# Altium PCB first crack.PcbDoc
Units mil, origin at the board's own origin, x right, y up, seen from the top; angles counter-clockwise.
Board outline 1150 x 1150 mil, 2 copper layers (Top Layer, Bottom Layer), stack 12.8 mil thick; 18 components, 33 nets, 116 pads, 36 vias.
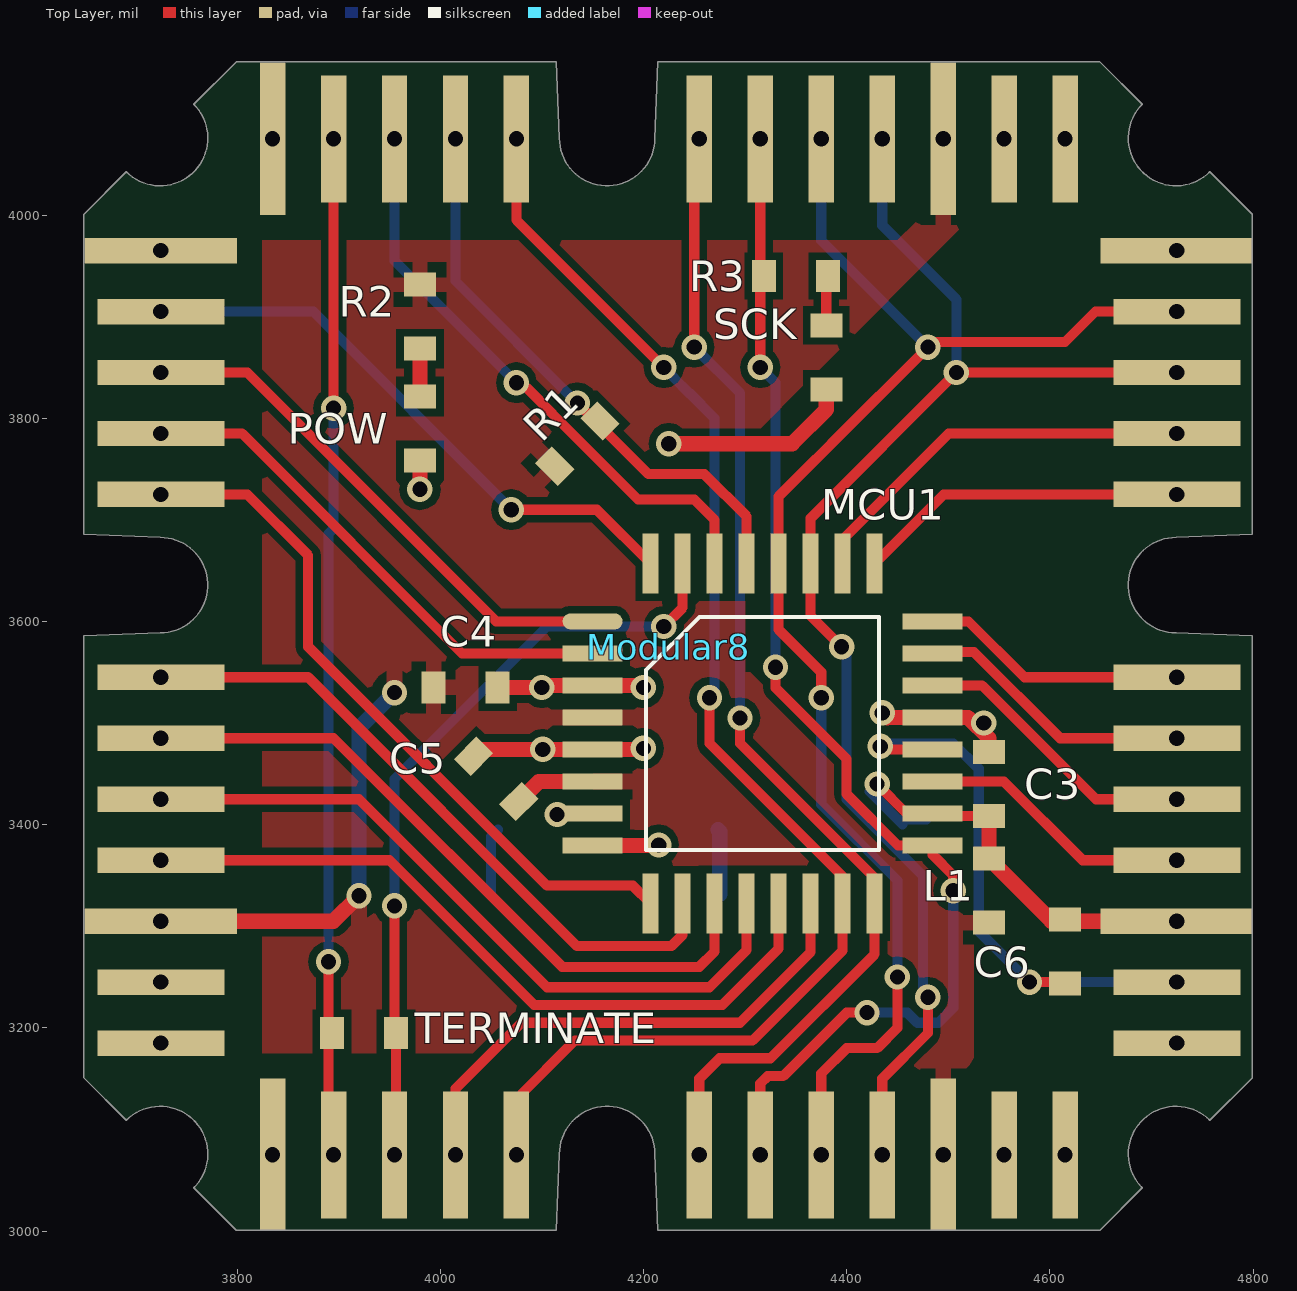
[diagram p0: Top Layer view]
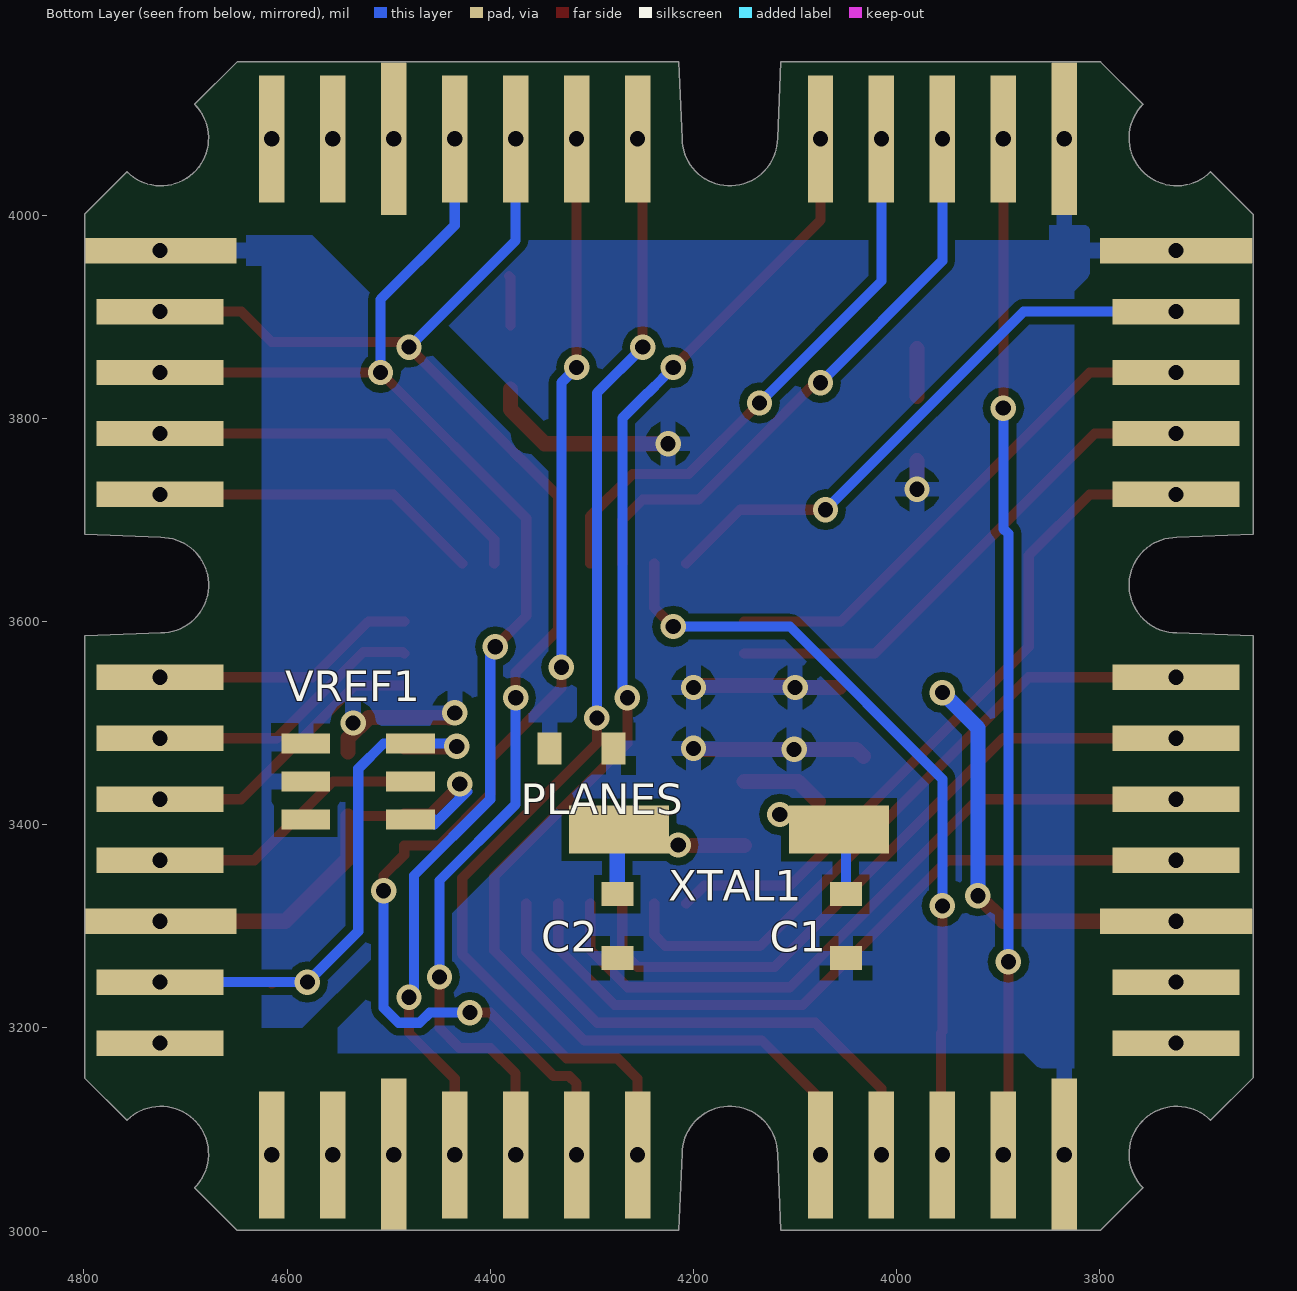
[diagram p1: Bottom Layer view, seen from below]

## Layer stack, top to bottom
Top Solder: solder mask 0.4, Solder Resist, Dk 3.5
Top Layer: signal copper 1.4
Dielectric 1: core 10, FR-4, Dk 4.2
Bottom Layer: signal copper 1.4
Bottom Solder: solder mask 0.4, Solder Resist, Dk 3.5

## Board outline
3691,3109 3649.23,3150.77 3649.23,3585.77 3724.91,3588.79 3724.23,3588.77 ccw(c3724.23,3635.77) 3724.23,3682.77 3649.23,3685.77 3649.23,4000.77 3691,4042.53 ccw(c3724.23,4075.77) 3757.47,4109 3799.23,4150.77 4114.23,4150.77 4117.23,4075.77 ccw(c4164.23,4075.77) 4211.23,4075.77 4211.21,4075.09 4214.23,4150.77 4649.23,4150.77 4691,4109 ccw(c4724.23,4075.77) 4757.47,4042.53 4799.23,4000.77 4799.23,3685.77 4724.23,3682.77 ccw(c4724.23,3635.77) 4724.23,3588.77 4723.56,3588.79 4799.23,3585.77 4799.23,3150.77 4757.47,3109 ccw(c4724.23,3075.77) 4691,3042.53 4649.23,3000.77 4214.23,3000.77 4211.21,3076.44 4211.23,3075.77 ccw(c4164.23,3075.77) 4117.23,3075.77 4114.23,3000.77 3799.23,3000.77 3757.47,3042.53 ccw(c3724.23,3075.77)

## Design rules (kind name [scope] priority, off if disabled: settings)
Clearance [All] p1: gap=7.5
PlaneConnect [All] p1: planeconnectstyle=Relief reliefexpansion=20 reliefentries=2 reliefconductorwidth=30 reliefairgap=10
PolygonConnect [All] p1: connectstyle=Relief reliefconductorwidth=15 reliefentries=4 polygonreliefangle="90 Angle" airgapwidth=10
RoutingTopology [All] p1: topology=Starburst
RoutingVias [All] p1: holewidth=20 width=27 viastyle="Through Hole" minholewidth=13 minwidth=21 maxholewidth=28 maxwidth=37
SolderMaskExpansion [All] p1: expansion=4
UnpouredPolygon [All] p1: allowunpoured=FALSE
Width [All] p1: maxlimit=15 minlimit=10 preferedwidth=10
27 further rules are at their usual default settings.

## Classes and differential pairs
component class module_rev1: POw

## Components (designator, comment, footprint, x,y, rotation, side; value= is the part's Value field where it differs from the comment)
C1 "Capacitor" 0603 4050,3300 r90 bottom
C2 "Capacitor" 0603 4275,3300 r270 bottom
C3 "Capacitor" 0603 4540,3440 r270 top
C4 "Capacitor" 0603 4025,3535 r0 top
C5 "Capacitor" 0603 4055,3445 r135 top
C6 "Capacitor" 0603 4615,3275 r90 top
L1 "Inductor" 0603 4540,3335 r90 top
MCU1 "ATmega328p" "ATmega328p TQFP" 4150,3600 r0 top locked
Modular8 "Modular8" MODULAR8 3725,3075 r0 top
PLANES "Resistor" 0603 4310,3475 r180 bottom
POW "LEDR" 0603 3980,3790 r90 top (schematic designator "POW LED")
R1 "Resistor" 0603 4135,3775 r45 top
R2 "Resistor" 0603 3980,3900 r270 top
R3 "Resistor" 0603 4350,3940 r0 top
SCK "LEDR" 0603 4380,3860 r90 top (schematic designator "SCK LED")
TERMINATE "Resistor" 0603 3925,3195 r0 top
VREF1 "Analog Ref" TSOT-23-6 4530,3442.52 r90 bottom
XTAL1 "Crystal" "XTAL M7x4x2" 4165,3395 r0 bottom

## Footprints (in the part's own frame and the unit in brackets; to place one, negate y for a bottom-side part, rotate by r counter-clockwise, add the part's x,y. Pads: shape width x height; smd on the part's side, far side on the other; paste and mask are expansions set on the pad)
0603 [mm]
  rect 0.6x0.8 smd: 1(-0.8,0) 2(0.8,0)
  body extent -1.2,-0.5 1.2,0.5, height 0.01
"ATmega328p TQFP" [mm]
  oval 1.5x0.4 smd: 1(0,0)
  rect 1.5x0.4 smd: 2(0,-0.8) 3(0,-1.6) 4(0,-2.4) 5(0,-3.2) 6(0,-4) 7(0,-4.8) 8(0,-5.6) 17(8.5,-5.6) 18(8.5,-4.8) 19(8.5,-4) 20(8.5,-3.2) 21(8.5,-2.4) 22(8.5,-1.6) 23(8.5,-0.8) 24(8.5,0)
  rect 0.4x1.5 smd: 9(1.45,-7.05) 10(2.25,-7.05) 11(3.05,-7.05) 12(3.85,-7.05) 13(4.65,-7.05) 14(5.45,-7.05) 15(6.25,-7.05) 16(7.05,-7.05) 25(7.05,1.45) 26(6.25,1.45) 27(5.45,1.45) 28(4.65,1.45) 29(3.85,1.45) 30(3.05,1.45) 31(2.25,1.45) 32(1.45,1.45)
  silkscreen extent 1.33,-5.72 7.17,0.12, body extent 1.28,-5.77 7.22,0.17
MODULAR8 [mil]
  rect 150x25 hole 15 unplated: 1(0,890) 10(0,230) 27(1000,230) 36(1000,890)
  rect 125x25 hole 15 unplated: 2(0,830) 3(0,770) 4(0,710) 5(0,650) 6(0,470) 7(0,410) 8(0,350) 9(0,290) 11(0,170) 12(0,110) 25(1000,110) 26(1000,170) 28(1000,290) 29(1000,350) 30(1000,410) 31(1000,470) 32(1000,650) 33(1000,710) 34(1000,770) 35(1000,830)
  rect 25x150 hole 15 unplated: 13(110,0) 22(770,0) 39(770,1000) 48(110,1000)
  rect 25x125 hole 15 unplated: 14(170,0) 15(230,0) 16(290,0) 17(350,0) 18(530,0) 19(590,0) 20(650,0) 21(710,0) 23(830,0) 24(890,0) 37(890,1000) 38(830,1000) 40(710,1000) 41(650,1000) 42(590,1000) 43(530,1000) 44(350,1000) 45(290,1000) 46(230,1000) 47(170,1000)
  body extent -33,33 -33,33
TSOT-23-6 [mm]
  rect 0.5x1.22 smd: 1(0.95,1.31) 2(0,1.31) 3(-0.95,1.31) 4(-0.95,-1.31) 5(0,-1.31) 6(0.95,-1.31)
"XTAL M7x4x2" [mm]
  rect 2.5x1.2 smd: 1(-2.75,0) 2(2.75,0)

## Part data
VREF1: library part LT1790BCS6

## Via types
v1: diameter 25, hole 15, Top Layer to Bottom Layer, 36 vias

## Nets (pads, with @x,y where several pads share a name; then routed paths per layer and width w, separated by ;. In a path a pad name is that pad's centre, name@x,y a point inside that pad or via, vN(x,y) a via of type N, cw(c..) or ccw(c..) an arc to the next point about the centre after c; other vN are vias at no path point)
AGND: C3.1 MCU1.21 Modular8.36 PLANES.1 VREF1.1 VREF1.2 | length 122.2
  Top Layer w15: v1@4440,3505 4440.51,3505.51 MCU1.21 4519.49,3505.51 4540,3485 C3.1
  other v1: 4535,3500 4435,3510
AREF: C6.1 MCU1.20 Modular8.26 VREF1.6 | length 578.6
  Top Layer w10: v1(4432.99,3477.01) 4435.98,3474.02 MCU1.20 ; v1(4580,3245) 4613.5,3245 C6.1
  Bottom Layer w10: v1(4432.99,3477.01) 4430.08,3479.92 VREF1.6 4505.08,3479.92 4530,3455 4530,3295 v1(4580,3245) Modular8.26
AVCC: C3.2 C6.2 L1.2 MCU1.18 Modular8.27 VREF1.4 | length 464.1
  Top Layer w10: v1(4430,3440) 4458.98,3411.02 MCU1.18 4487.17,3408.5 C3.2
  Top Layer w15: C3.2 L1.2 4601.5,3305 Modular8.27
  Bottom Layer w10: v1@4422.68,3432.68 4430,3425.35 ; v1(4430,3440) 4430,3425.35 ; VREF1.4 4455,3405.12 4455,3400.35 4430,3425.35
DGND: C1.1 C2.2 C4.2 C5.2 MCU1.3 MCU1.5 Modular8.1 Modular8.13 Modular8.48 PLANES.2 POW.1 SCK.1 | length 533
  Top Layer w15: v1(3980,3730) POW.1 ; C5.2 4039.47,3474.02 v1(4100.98,3474.02) MCU1.5 4199.02,3474.02 v1(4200,3475) ; C4.2 v1(4100,3535) 4102.01,3537.01 MCU1.3 4197.99,3537.01 v1(4200,3535) ; v1(4225,3775) 4346.5,3775 4380,3808.5 SCK.1
MISO: MCU1.16 Modular8.18 Modular8.43 | length 1185.5
  Top Layer w10: v1(4250,3870) 4250,4060 4260,4070 Modular8.43 ; Modular8.18 4255,3150 4275,3170 4325,3170 4427.56,3272.56 MCU1.16 4427.56,3347.44 4295,3480 v1(4295,3505)
  Bottom Layer w10: v1(4250,3870) 4295,3825 v1(4295,3505) v1@4300,3505
MOSI: MCU1.15 Modular8.17 Modular8.44 | length 1372.8
  Top Layer w10: Modular8.17 4075,3130 4132.5,3187.5 4307.5,3187.5 4396.06,3276.06 MCU1.15 4396.06,3348.94 4265,3480 v1(4265,3525) ; Modular8.44 4075,3995 v1(4220,3850)
  Bottom Layer w10: v1(4220,3850) 4230,3840 4230,3839.64 4244.64,3825 4245,3825 4270,3800 4270,3530 v1(4265,3525)
NetC1_2: C1.2 MCU1.7 XTAL1.1 | length 66.3
  Bottom Layer w10: C1.2 4050,3388.27 XTAL1.1
  other v1: 4115,3410
NetC2_1: C2.1 MCU1.8 XTAL1.2 | length 129.4
  Top Layer w15: MCU1.8 4214.53,3379.53 v1(4215,3380)
  Bottom Layer w15: XTAL1.2 4275,3393.27 C2.1
NetMCU1_1: MCU1.1 Modular8.3 | length 526.5
  Top Layer w10: Modular8.3 3810,3845 4055,3600 MCU1.1
NetMCU1_2: MCU1.2 Modular8.4 | length 514.7
  Top Layer w10: Modular8.4 3805,3785 4021.5,3568.5 MCU1.2
NetMCU1_9: MCU1.9 Modular8.5 | length 701.6
  Top Layer w10: Modular8.5 3810,3725 3870,3665 3870,3575 4105,3340 4189.53,3340 MCU1.9
NetMCU1_10: MCU1.10 Modular8.6 | length 658.7
  Top Layer w10: Modular8.6 3870,3545 4134.59,3280.41 4227.46,3280.41 4238.58,3291.54 MCU1.10
NetMCU1_11: MCU1.11 Modular8.7 | length 691.9
  Top Layer w10: Modular8.7 3895,3485 4120,3260 4255,3260 4270.08,3275.08 MCU1.11
NetMCU1_12: MCU1.12 Modular8.8 | length 714.2
  Top Layer w10: Modular8.8 3920,3425 4105,3240 4265,3240 4301.57,3276.57 MCU1.12
NetMCU1_13: MCU1.13 Modular8.9 | length 734.5
  Top Layer w10: Modular8.9 3950,3365 4092.5,3222.5 4277.5,3222.5 4333.07,3278.07 MCU1.13
NetMCU1_19: MCU1.19 Modular8.28 | length 272.5
  Top Layer w10: MCU1.19 4554.76,3442.52 4632.28,3365 Modular8.28
NetMCU1_22: MCU1.22 Modular8.29 | length 286.7
  Top Layer w10: MCU1.22 4533.35,3537.01 4645.36,3425 Modular8.29
NetMCU1_23: MCU1.23 Modular8.30 | length 276.2
  Top Layer w10: MCU1.23 4486.14,3570 4525.1,3570 4610.1,3485 Modular8.30
NetMCU1_24: MCU1.24 Modular8.31 | length 263.1
  Top Layer w10: MCU1.24 4520,3600 4575,3545 Modular8.31
NetMCU1_25: MCU1.25 Modular8.32 | length 325.6
  Top Layer w10: MCU1.25 4495.47,3725 Modular8.32
NetMCU1_26: MCU1.26 Modular8.33 | length 395.7
  Top Layer w10: MCU1.26 4396.06,3680.67 4500.39,3785 Modular8.33
NetMCU1_29: MCU1.29 Modular8.45 R1.2 | length 568.8
  Top Layer w10: v1(4135,3815) 4205,3745 4260,3745 4301.57,3703.43 MCU1.29
  Bottom Layer w10: Modular8.45 4015,3935 v1(4135,3815)
NetMCU1_30: MCU1.30 Modular8.46 | length 571.7
  Top Layer w10: v1@4085,3830 4110,3805 4110,3804.64 4194.64,3720 4250,3720 4270.08,3699.92 MCU1.30
  Bottom Layer w10: Modular8.46 3955,3955 v1(4075,3835)
NetMCU1_32: MCU1.32 Modular8.2 | length 584.8
  Top Layer w10: v1(4070,3710) 4154.17,3710 MCU1.32
  Bottom Layer w10: Modular8.2 3875,3905 v1(4070,3710)
"NetPOW LED_2": POW.2 R2.2 | length 47
  Top Layer w15: POW.2 R2.2
NetR3_2: R3.2 SCK.2 | length 49.1
  Top Layer w10: SCK.2 4380,3938.5 R3.2
PGM: MCU1.14 Modular8.16 | length 518.2
  Top Layer w10: Modular8.16 4015,3140 4080,3205 4295,3205 4364.57,3274.57 MCU1.14
SCK: MCU1.17 Modular8.19 Modular8.42 R3.1 | length 1208.4
  Top Layer w10: Modular8.19 4315,3145.25 4322.25,3152.5 4337.5,3152.5 4400,3215 v1(4420,3215) ; v1(4315,3850) Modular8.42@4315,4030 ; v1(4330,3555) 4330,3534.64 4400,3464.64 4400,3430 4450.47,3379.53 MCU1.17 4484.65,3370.35 4505,3350 v1(4505,3335)
  Bottom Layer w10: v1(4315,3850) 4330,3835 v1(4330,3555) ; v1(4420,3215) 4459.64,3215 4469.64,3205 4490.36,3205 4505,3219.64 v1(4505,3335)
SCL: MCU1.28 Modular8.20 Modular8.35 Modular8.41 | length 1466.1
  Top Layer w10: Modular8.20 4375,3155 4400,3180 4430,3180 4450,3200 v1(4450,3250) ; v1(4375,3525) 4375,3550 4333.07,3591.93 MCU1.28 4333.07,3723.07 4370,3760 4370.36,3760 4385,3774.64 4385,3775 v1(4480,3870) v1@4485,3875 ; v1@4480,3875 v1@4485,3875 ; Modular8.35 4645,3905 4615,3875 v1@4485,3875
  Bottom Layer w10: v1(4375,3525) 4375,3420 4450,3345 v1(4450,3250) ; Modular8.41 4375,3975 v1(4480,3870)
SDA: MCU1.27 Modular8.21 Modular8.34 Modular8.40 | length 1369.6
  Top Layer w10: v1@4392.5,3577.5 4364.57,3605.43 MCU1.27 4364.57,3701.56 v1(4508.01,3845) Modular8.34 ; Modular8.21 4435,3150 4480,3195 v1(4480,3230)
  Bottom Layer w10: v1(4395,3575) 4400,3570 4400,3425 4475,3350 4475,3235 v1(4480,3230) ; Modular8.40 4435,3990 4508.01,3916.99 v1(4508.01,3845)
THRU: Modular8.14 Modular8.47 TERMINATE.1 | length 1004.1
  Top Layer w10: v1(3890,3265) 3890,3080 Modular8.14 ; v1(3895,3810) Modular8.47
  Bottom Layer w10: v1(3890,3265) 3890,3686.25 3895,3691.25 v1(3895,3810)
TX: MCU1.31 Modular8.15 TERMINATE.2 | length 768.2
  Top Layer w10: Modular8.15 3956.5,3076.5 TERMINATE.2 3955,3196.5 v1(3955,3320) ; v1(4220,3595) 4238.58,3613.58 MCU1.31
  Bottom Layer w10: v1(3955,3320) 3955,3445 4105,3595 v1(4220,3595)
VCC: C4.1 C5.1 L1.1 MCU1.4 MCU1.6 Modular8.10 Modular8.22 Modular8.39 R1.1 R2.1 | length 500.8
  Top Layer w15: Modular8.10 3895,3305 v1(3920,3330) ; C5.1 4097.06,3442.52 MCU1.6
  Bottom Layer w15: v1(3920,3330) 3920,3495 v1(3955,3530)
pads on no net: Modular8.11 Modular8.12 Modular8.23 Modular8.24 Modular8.25 Modular8.37 Modular8.38 VREF1.3 VREF1.5

## Polygon pours and split planes (outlines as drawn)
VCC on Top Layer "Bottom Layer-No Net" (solid, pour order 11): 4525,3330 4305,3550 4300,3550 4300,3775 4475,3950 4525,4000 4500,4025 4450,3975 3825,3975 3825,3325 3825,3175 4460,3175 4460,3165 4475,3150 4500,3125 4525,3170.71
DGND on Bottom Layer "Bottom Layer-No Net" (solid, pour order 9): 3825,4025 3775,3975 3775,3950 3800,3950 3825,3925 3825,3125 3850,3125 3850,3150 3875,3175 4550,3175 4550,3200 4300,3450 4300,3750 4475,3925 4475,3950 4471.5,3953.5 4450,3975 3850,3975 3850,4025
AGND on Bottom Layer "Bottom Layer-No Net" (solid, pour order 7): 4660,3980 4575,3980 4315,3720 4315,3465 4320,3465 4355,3430 4585,3200 4625,3200 4625,3950 4675,3950 4675,3975

## Silkscreen, mask and mechanical layers (free items; w line width, h text height)
Top Solder:
  rectangle: 3650,3075 3800,4125
  rectangle: 3650,4000 4800,4150
  rectangle: 4650,3000 4800,4150
  rectangle: 3650,3000 4800,3150
Bottom Solder:
  rectangle: 3650,3000 4800,3150
  rectangle: 4650,3150 4800,4150
  rectangle: 3650,4000 4650,4150
  rectangle: 3650,3150 3800,4000